# EAGLE board Projeto_SE v40 (EAGLE 9.7.0)
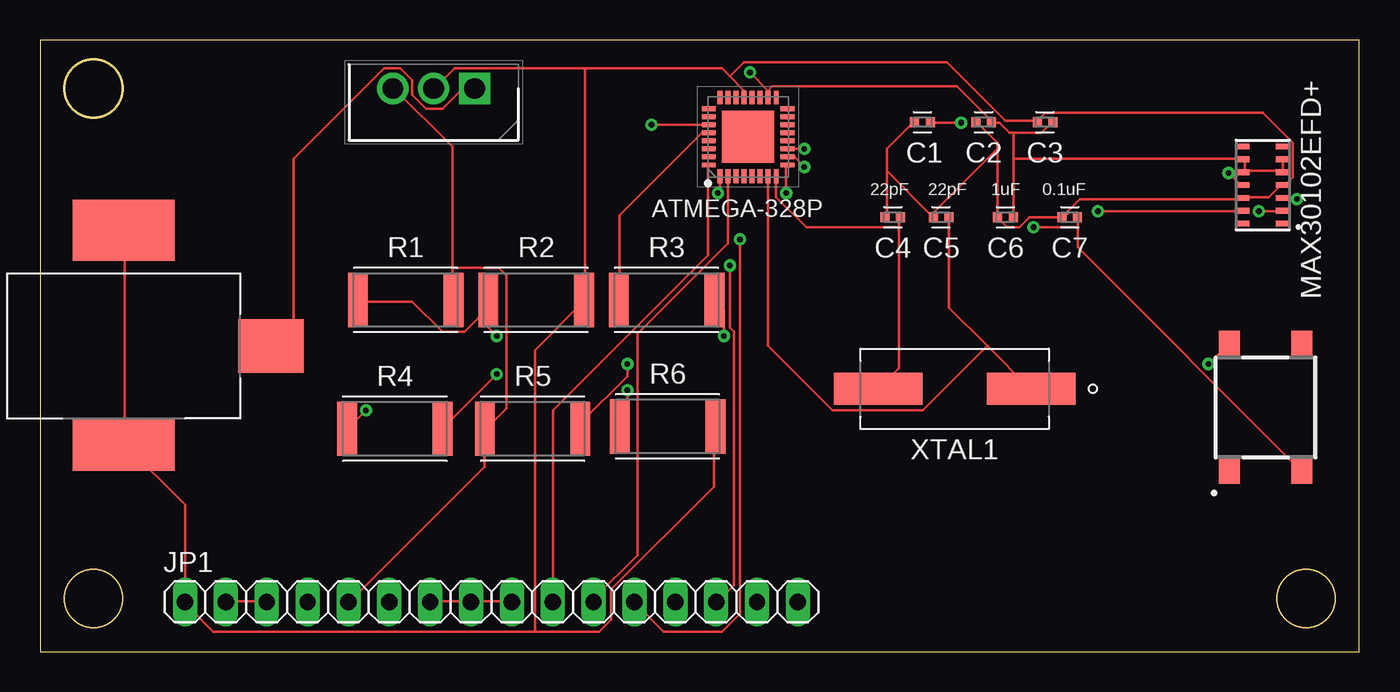
[diagram p0: board, top side]
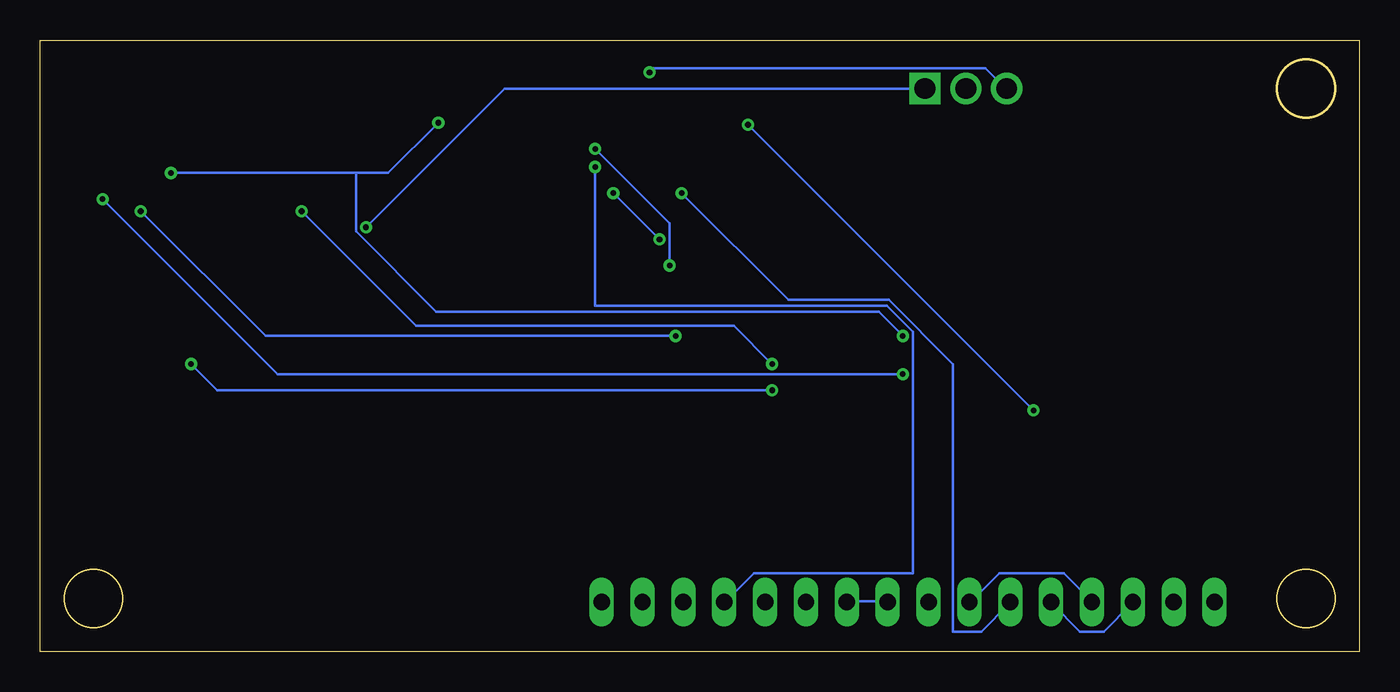
[diagram p1: board, bottom side, seen from below]

Size 82 x 38 mm. Coordinates in mm from the lower left corner, seen from the top.
Outline: 0,0 82,0 82,38 0,38 0,0
Outline: circle at 78.7,3.3 radius 1.8
Outline: circle at 3.3,35 radius 1.8
Outline: circle at 3.3,3.3 radius 1.8
Copper layers (1*16): Top 0.035mm / dielectric 1.5mm / Bottom 0.035mm
Design rules "default": minimum track width 6mil, minimum drill 0.35mm, track to track 6mil, track to pad 6mil, pad to pad 6mil, via to via 6mil, smd to smd 6mil, copper to edge 40mil, drill to drill 6mil, minimum pad ring 10mil, minimum via ring 8mil, stop-mask expansion 4mil, vias tented up to drill 0mil, thermal gap 10mil

## Footprints (pad centres in the part's own frame; a part is rotated, then mirrored left to right if it is on the bottom)
CAPC1005X60 = smd 0.56 x 0.629: 1 -0.485,0; 2 0.485,0
TO254P470X1028X1955-3P = drill 1.29 pad 1.935 square: 1 0,0 | drill 1.29 pad 1.935: 2 2.54,0; 3 5.08,0
14-LEAD-OESIP = smd 0.75 x 0.35: 1 -1.2,2.4; 2 -1.2,1.6; 3 -1.2,0.8; 4 -1.2,0; 5 -1.2,-0.8; 6 -1.2,-1.6; 7 -1.2,-2.4; 8 1.2,-2.4; 9 1.2,-1.6; 10 1.2,-0.8; 11 1.2,0; 12 1.2,0.8; 13 1.2,1.6; 14 1.2,2.4
QFN50P500X500X100-33N = smd 0.85 x 0.3: 1 -2.45,1.75; 2 -2.45,1.25; 3 -2.45,0.75; 4 -2.45,0.25; 5 -2.45,-0.25; 6 -2.45,-0.75; 7 -2.45,-1.25; 8 -2.45,-1.75; 17 2.45,-1.75; 18 2.45,-1.25; 19 2.45,-0.75; 20 2.45,-0.25; 21 2.45,0.25; 22 2.45,0.75; 23 2.45,1.25; 24 2.45,1.75 | smd 0.3 x 0.85: 9 -1.75,-2.45; 10 -1.25,-2.45; 11 -0.75,-2.45; 12 -0.25,-2.45; 13 0.25,-2.45; 14 0.75,-2.45; 15 1.25,-2.45; 16 1.75,-2.45; 25 1.75,2.45; 26 1.25,2.45; 27 0.75,2.45; 28 0.25,2.45; 29 -0.25,2.45; 30 -0.75,2.45; 31 -1.25,2.45; 32 -1.75,2.45 | smd 3.25 x 3.25: 33 0,0
RASM722X = smd 3.3 x 4.06: PIN 0,9.14 | smd 3.3 x 6.35: SHUNT 6.1,0 | smd 3.81 x 6.35: SLEEVE -7.19,0
1X16 = drill 1.016 long: 1 -19.05,0; 2 -16.51,0; 3 -13.97,0; 4 -11.43,0; 5 -8.89,0; 6 -6.35,0; 7 -3.81,0; 8 -1.27,0; 9 1.27,0; 10 3.81,0; 11 6.35,0; 12 8.89,0; 13 11.43,0; 14 13.97,0; 15 16.51,0; 16 19.05,0
RESC6332X71 = smd 1.231 x 3.37: 1 -2.97,0; 2 2.97,0
430182070816 = smd 1.55 x 1.3: 1 -3.975,2.25; 2 -3.975,-2.25; 3 3.975,2.25; 4 3.975,-2.25
XTAL1170X500X450N = smd 5.5 x 2: 1 -4.75,0; 2 4.75,0

## Placement (x,y rotation side)
C1  1uF  [CAPC1005X60]  54.84,32.91 180 top
C2  1uF  [CAPC1005X60]  58.65,32.91 180 top
C3  1uF  [CAPC1005X60]  62.46,32.91 180 top
C4  22pF  [CAPC1005X60]  53,27 180 top
C5  22pF  [CAPC1005X60]  56,27 180 top
C6  1uF  [CAPC1005X60]  60,27 180 top
C7  1uF  [CAPC1005X60]  64,27 180 top
IC2  LM7805CT  [TO254P470X1028X1955-3P]  27,35 180 top
IC3  MAX30102EFD+  [14-LEAD-OESIP]  76,29 180 top
IC4  ATMEGA328P-MNR  [QFN50P500X500X100-33N]  44,32 90 top
J1  RASM722  [RASM722X]  5.19,19 270 top
JP1  PINHD-1X16  [1X16]  28.05,3.1 0 top
R1  R1_355Ω  [RESC6332X71]  22.72,21.86 0 top
R2  R2_200Ω  [RESC6332X71]  30.83,21.86 0 top
R3  R3_2kΩ  [RESC6332X71]  38.94,21.86 0 top
R4  R4_2kΩ  [RESC6332X71]  22.05,13.86 0 top
R5  R5_2kΩ  [RESC6332X71]  30.61,13.86 0 top
R6  R6_10kΩ  [RESC6332X71]  39,14 0 top
S1  430182050816  [430182070816]  76.17,15.18 90 top
XTAL1  16MHz  [XTAL1170X500X450N]  56.84,16.34 180 top

## Library data of the parts
C1-C7 = Capacitor; CATEGORY: Capacitor
IC2 = LM7805CT; ARROW_PART_NUMBER: LM7805CT; ARROW_PRICE-STOCK: https://www.arrow.com/en/products/lm7805ct/texas-instruments; DESCRIPTION: Linear voltage regulator,LM7805CT 5V 1A; HEIGHT: 4.7mm; MANUFACTURER_NAME: Texas Instruments; MANUFACTURER_PART_NUMBER: LM7805CT; MOUSER_PART_NUMBER: 926-LM7805CT; MOUSER_PRICE-STOCK: https://www.mouser.co.uk/ProductDetail/Texas-Instruments/LM7805CT?qs=QbsRYf82W3EaqXeMDVwIfQ%3D%3D
IC3 = MAX30102EFD; DESCRIPTION: MAXIM INTEGRATED PRODUCTS - MAX30102EFD+ - PULSE OXIMETER/HEART RATE SENSOR, OESIP; HEIGHT: mm; MANUFACTURER_NAME: Maxim Integrated; MANUFACTURER_PART_NUMBER: MAX30102EFD+; MOUSER_PART_NUMBER: 700-MAX30102EFD+; MOUSER_PRICE-STOCK: https://www.mouser.co.uk/ProductDetail/Maxim-Integrated/MAX30102EFD%2b?qs=nVS1qgv%252BQrk9UYEvS27V%2Fg%3D%3D
IC4 = ATMEGA328P; ARROW_PART_NUMBER: ATMEGA328P-MNR; ARROW_PRICE-STOCK: https://www.arrow.com/en/products/atmega328p-mnr/microchip-technology?region=nac; DESCRIPTION: 8-bit Microcontrollers - MCU AVR 32K FLSH 2K SRAM 1KB EE-20 MHZ 105C; HEIGHT: 1mm; MANUFACTURER_NAME: Microchip; MANUFACTURER_PART_NUMBER: ATMEGA328P-MNR; MOUSER_PART_NUMBER: 556-ATMEGA328P-MNR; MOUSER_PRICE-STOCK: https://www.mouser.co.uk/ProductDetail/Microchip-Technology-Atmel/ATMEGA328P-MNR?qs=6Dg1WZIWLC5fsr6lNbxG3A%3D%3D
J1 = Connector; CREATED_BY: PCBLayout.com; DIGI-KEY_PART_NO: RASM722X-ND; MANUFACTURER: Switchcraft Inc.; MPN: RASM722X
JP1 = Connector; CATEGORY: CONNECTOR; SUB-CATEGORY: PIN-HEADER
R1-R6 = Resistor; CATEGORY: Resistor; SUB-CATEGORY: Fixed
S1 = button; DESCRIPTION: Black Tactile Tactile Switch, NO 50 mA 1.6mm Surface Mount; HEIGHT: mm; MANUFACTURER_NAME: Wurth Elektronik; MANUFACTURER_PART_NUMBER: 430182050816; MOUSER_PART_NUMBER: 710-430182050816; MOUSER_PRICE-STOCK: https://www.mouser.co.uk/ProductDetail/Wurth-Elektronik/430182050816?qs=wr8lucFkNMUyle0jQPgWGw%3D%3D
XTAL1 = Frequency-Source; CATEGORY: Resistance Weld; DESCRIPTION: SMD Crystal; FREQUENCY: 16MHZ; MANUFRACTURER: Fox Electronics; MPN: FC4SDCBMF16.0-T1; OPERATING_TEMPERATURE: -20*C to 70*c; PART_STATUS: Active; ROHS_COMPLIANT: COMPLIANT; SERIES: C4SD; SUB_CATEGORY: Resistance Weld SMD Crystal; TOLERANCE: ±30ppm; TYPE: Crystal

## Nets
5V: C2.1 C3.1 C6.1 IC2.3 IC3.5 IC3.6 IC3.9 IC3.10 IC4.18 JP1.2 JP1.3 JP1.5 R1.2 R5.1
GND: C1.2 C2.2 C3.2 C4.2 C5.2 C6.2 C7.2 IC2.2 IC3.4 IC3.12 IC4.21 J1.SHUNT J1.SLEEVE JP1.1 R2.2 R6.2
N$1: C1.1 IC3.11 R1.1 R2.1
N$2: C4.1 IC4.8 XTAL1.2
N$3: C5.1 IC4.7 XTAL1.1
N$4: IC3.2 R3.2
N$6: IC3.3 R4.2
N$7: R6.1 S1.3
N$8: IC3.13 R5.2
N$9: C7.1 IC2.1 J1.PIN S1.2
N$10: IC4.1 JP1.6
N$11: IC4.2 JP1.11
N$12: IC4.9 JP1.12
N$13: IC4.10 JP1.13
N$14: IC4.11 JP1.14
N$15: IC4.32 JP1.4 JP1.7 JP1.8 JP1.9 JP1.10
SCL: IC4.28 R3.1
SDA: IC4.27 R4.1

## Tracks (layer width: path | path; a pad name or v marks a point on that pad's centre or on a via)
5V  (via drill 0.35)
  Top 0.152: 74.88,29.88 74.88,30.5 IC3.9 74.75,30.62 60.5,30.62 | IC3.6 77.25,30.5 77.25,29.88 IC3.5 77.12,29.88 74.88,29.88 | 74.88,29.88 IC3.10 | 60.5,32.25 62.25,32.25 62.88,32.88 C3.1 | 60.5,32.25 60.25,32.25 59.62,32.88 59.25,32.88 C2.1 59.12,33 57,35.12 45.5,35.12 45.25,34.88 | 60.5,32.25 60.5,30.62 | 60.5,30.62 60.5,27 C6.1 | 45.25,34.88 IC4.18 | 25.62,23.88 25.62,31.38 22,35 IC2.3 | 25.62,23.88 25.62,21.88 R1.2 | JP1.2 11.62,3.12 14,3.12 JP1.3 | JP1.5 19.25,3.12 27.62,11.5 27.62,13.75 R5.1 27.75,13.88 29,15.12 29,23.38 28.5,23.88 25.62,23.88 | v44.12,36 45.25,34.88
  Bottom 0.152: JP1.5 19.12,3 17.38,1.25 15.88,1.25 14.12,3 JP1.3 | v44.12,36 43.88,36.25 23.25,36.25 22,35 IC2.3
GND
  Top 0.152: 30.75,1.25 10.75,1.25 9,3 JP1.1 9,9.12 5.25,12.88 J1.SHUNT 5.25,13 5.25,26.12 J1.SLEEVE | 30.75,1.25 34.75,1.25 35.5,2 35.5,3.88 41.88,10.25 41.88,14 R6.2 | 52.62,29.88 52.62,31.25 54.25,32.88 C1.2 | 52.62,29.88 52.62,27 C4.2 | 52.62,29.88 55.38,27.12 | 55.38,27.12 55.5,27 C5.2 55.38,27.12 | 59.5,31.25 59.5,31.62 58.25,32.88 C2.2 | 59.5,31.25 59.5,27 | 59.5,27 60.12,26.38 60.88,26.38 61.5,27 C7.2 63.62,27 63.88,27.25 63.88,27.38 64.62,28.12 74.75,28.12 IC3.12 74.88,28.25 76.38,28.25 77.12,29 IC3.4 77.38,29 77.88,29.5 77.88,31.62 76,33.5 62.5,33.5 62,33 C3.2 61.88,33 60,33 56.38,36.62 43.75,36.62 42.88,35.75 | 59.5,27 C6.2 | 59.5,31.25 55.38,27.12 | IC4.21 43.75,34.88 42.88,35.75 | 42.88,35.75 42.38,36.25 33.88,36.25 | 33.88,36.25 25.75,36.25 24.5,35 IC2.2 | 33.88,36.25 33.88,21.88 R2.2 33.75,21.75 30.75,18.75 30.75,1.25
N$1  (via drill 0.35)
  Top 0.152: 27.25,20.75 27.75,21.25 27.75,21.75 R2.1 27.25,20.75 | 27.25,20.75 26.38,19.88 25,19.88 23.12,21.75 19.88,21.75 R1.1 | v57.25,32.88 55.38,32.88 C1.1 | v73.88,29.75 74.62,29 IC3.11 | v28.38,19.62 27.25,20.75
  Bottom 0.152: v57.25,32.88 60.38,29.75 62.38,29.75 | v73.88,29.75 62.38,29.75 | v28.38,19.62 29.88,21.12 57.38,21.12 62.38,26.12 62.38,29.75
N$2
  Top 0.152: 53.38,26.38 53.38,17.62 XTAL1.2 | 53.38,26.38 53.38,27 C4.1 | IC4.8 45.75,28.25 47.62,26.38 53.38,26.38
N$3
  Top 0.152: 58.88,19 61.5,16.38 XTAL1.1 | 58.88,19 56.5,21.38 56.5,27 C5.1 | IC4.7 45.25,19 49.25,15 54.88,15 58.88,19
N$4  (via drill 0.35)
  Top 0.152: v75.75,27.38 77.12,27.38 IC3.2 | v42.5,19.62 42.5,21.25 42,21.75 R3.2
  Bottom 0.152: v75.75,27.38 68,19.62 v42.5,19.62
N$6  (via drill 0.35)
  Top 0.152: v78.12,28.12 77.25,28.12 IC3.3 | v28.38,17.25 25,13.88 R4.2
  Bottom 0.152: v78.12,28.12 67.25,17.25 v28.38,17.25
N$7  (via drill 0.35)
  Top 0.152: v72.62,17.88 73.88,19.12 S1.3 | v36.5,16.25 36.5,14.38 36.12,14 R6.1
  Bottom 0.152: v72.62,17.88 71,16.25 v36.5,16.25
N$8  (via drill 0.35)
  Top 0.152: v65.75,27.38 74.75,27.38 IC3.13 | v36.5,17.88 36.5,17.12 33.62,14.25 33.62,13.88 R5.2
  Bottom 0.152: v65.75,27.38 58.62,20.25 38.88,20.25 v36.5,17.88
N$9  (via drill 0.35)
  Top 0.152: 64.5,26.38 64.5,25.12 78.38,11.25 S1.2 | 64.5,26.38 64.5,27 C7.1 | IC2.1 26.25,35 25,33.75 24,33.75 23.12,34.62 23.12,35.5 22.38,36.25 21.38,36.25 15.75,30.62 15.75,20.38 14.38,19 J1.PIN | v61.75,26.38 64.5,26.38
  Bottom 0.152: v61.75,26.38 53.12,35 IC2.1
N$10  (via drill 0.35)
  Top 0.152: IC4.1 42.25,28.62 v42.12,28.5
  Bottom 0.152: v42.12,28.5 35.5,21.88 29.25,21.88 25.25,17.88 25.25,1.25 23.5,1.25 21.75,3 JP1.6
N$11
  Top 0.152: IC4.2 42.75,25.38 37.12,19.75 37.12,6 34.5,3.38 34.5,3.12 JP1.11
N$12  (via drill 0.35)
  Top 0.152: v46.38,28.5 46.38,30.25 IC4.9 | v43.5,25.62 43.5,2.38 42.38,1.25 38.75,1.25 37,3 JP1.12
  Bottom 0.152: v43.5,25.62 v46.38,28.5
N$13  (via drill 0.35)
  Top 0.152: IC4.10 46.88,30.75 v47.5,30.12
  Bottom 0.152: v47.5,30.12 47.5,21.5 29.38,21.5 27.75,19.88 27.75,4.88 37.62,4.88 39.38,3.12 JP1.13
N$14  (via drill 0.35)
  Top 0.152: v47.5,31.25 IC4.11 | v42.88,24 42.88,20.12 43.12,19.88 43.12,4.12 42.12,3.12 JP1.14
  Bottom 0.152: v47.5,31.25 42.88,26.62 v42.88,24
N$15
  Top 0.152: JP1.9 29.25,3.12 26.88,3.12 JP1.8 26.75,3.12 24.25,3.12 JP1.7 | IC4.32 41.5,30.25 41.5,24.62 31.88,15 31.88,3.12 JP1.10
  Bottom 0.152: JP1.4 16.62,3.12 18.38,4.88 22.38,4.88 24.12,3.12 JP1.7 | JP1.9 29.38,3.12 31.75,3.12 JP1.10
SCL
  Top 0.152: IC4.28 41.12,32.25 36,27.12 36,21.88 R3.1
SDA  (via drill 0.35)
  Top 0.152: v38,32.75 IC4.27 | v20.25,15 19.12,13.88 R4.1
  Bottom 0.152: v20.25,15 v38,32.75

## Text on the board
tNames: C1 | 22pF | 22pF | 1uF | 0.1uF | ATMEGA-328P